# Altium PCB PCB1.PcbDoc
Units mil, origin at the board's own origin, x right, y up, seen from the top; angles counter-clockwise.
Board outline 6000 x 4000 mil, 2 copper layers (Top Layer, Bottom Layer); 14 components, 0 nets, 202 pads, 0 vias.
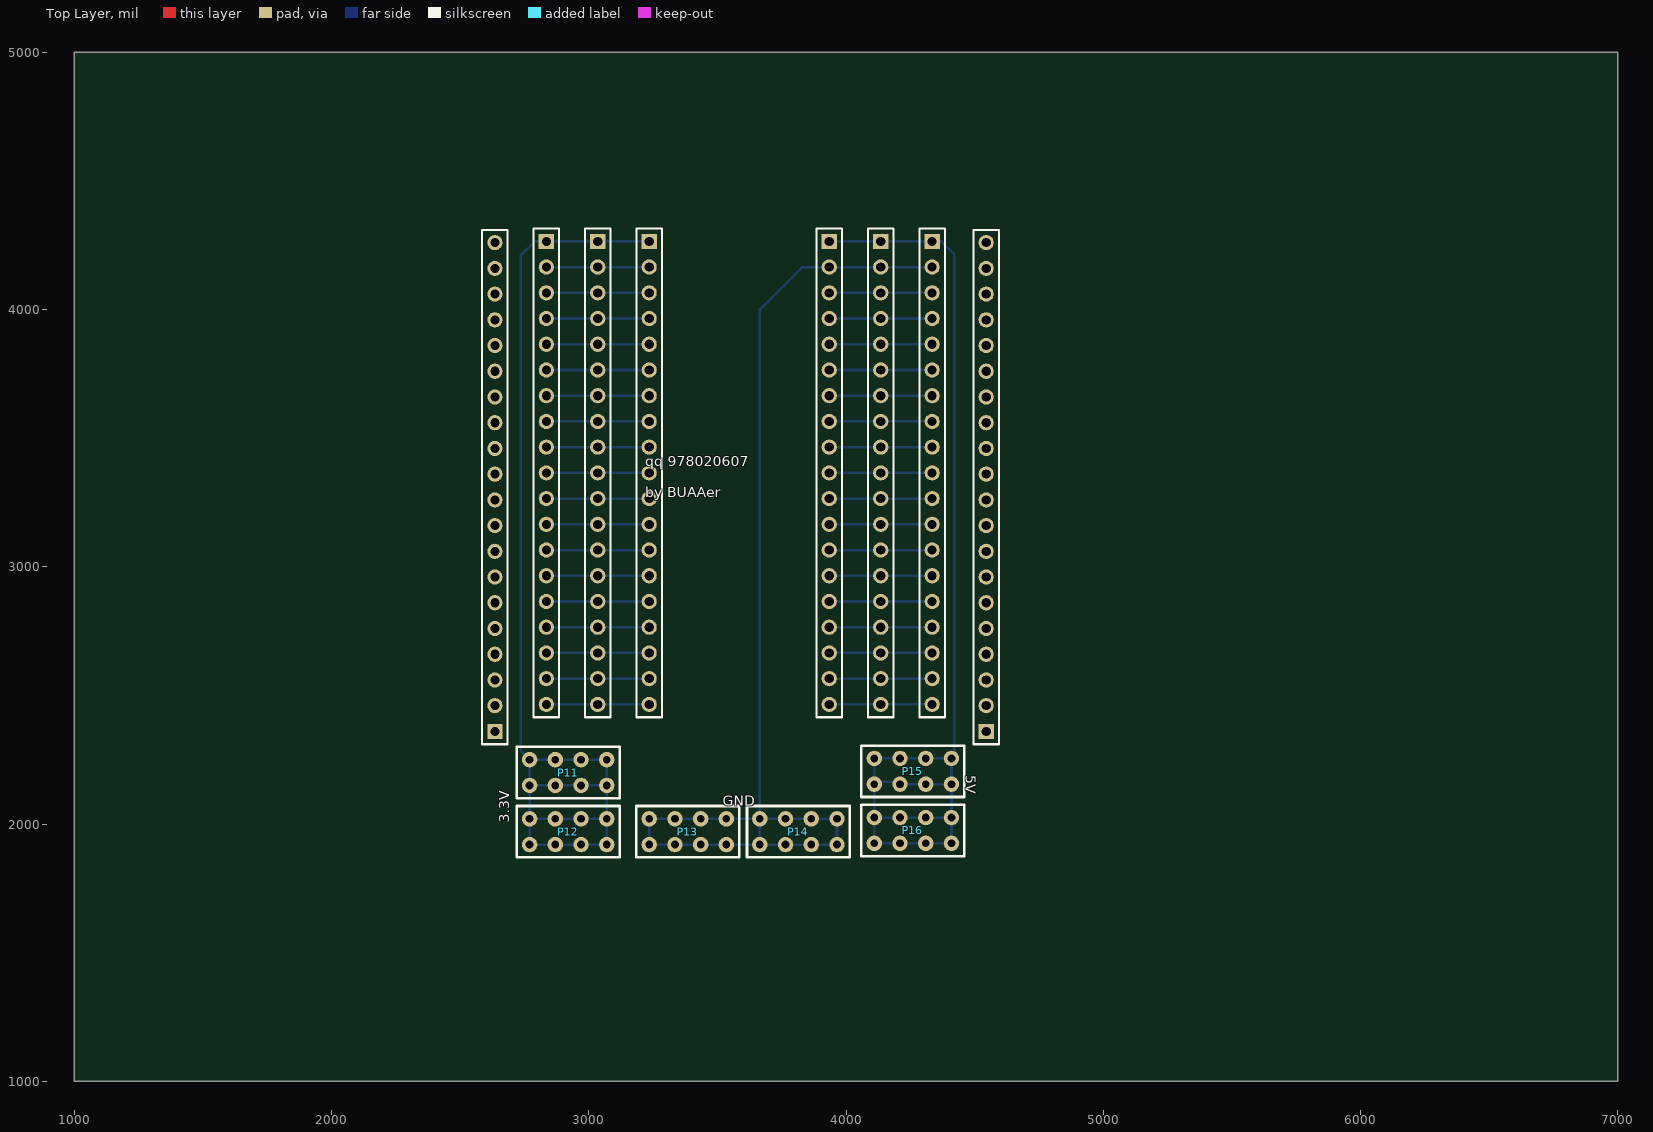
[diagram p0: Top Layer view]
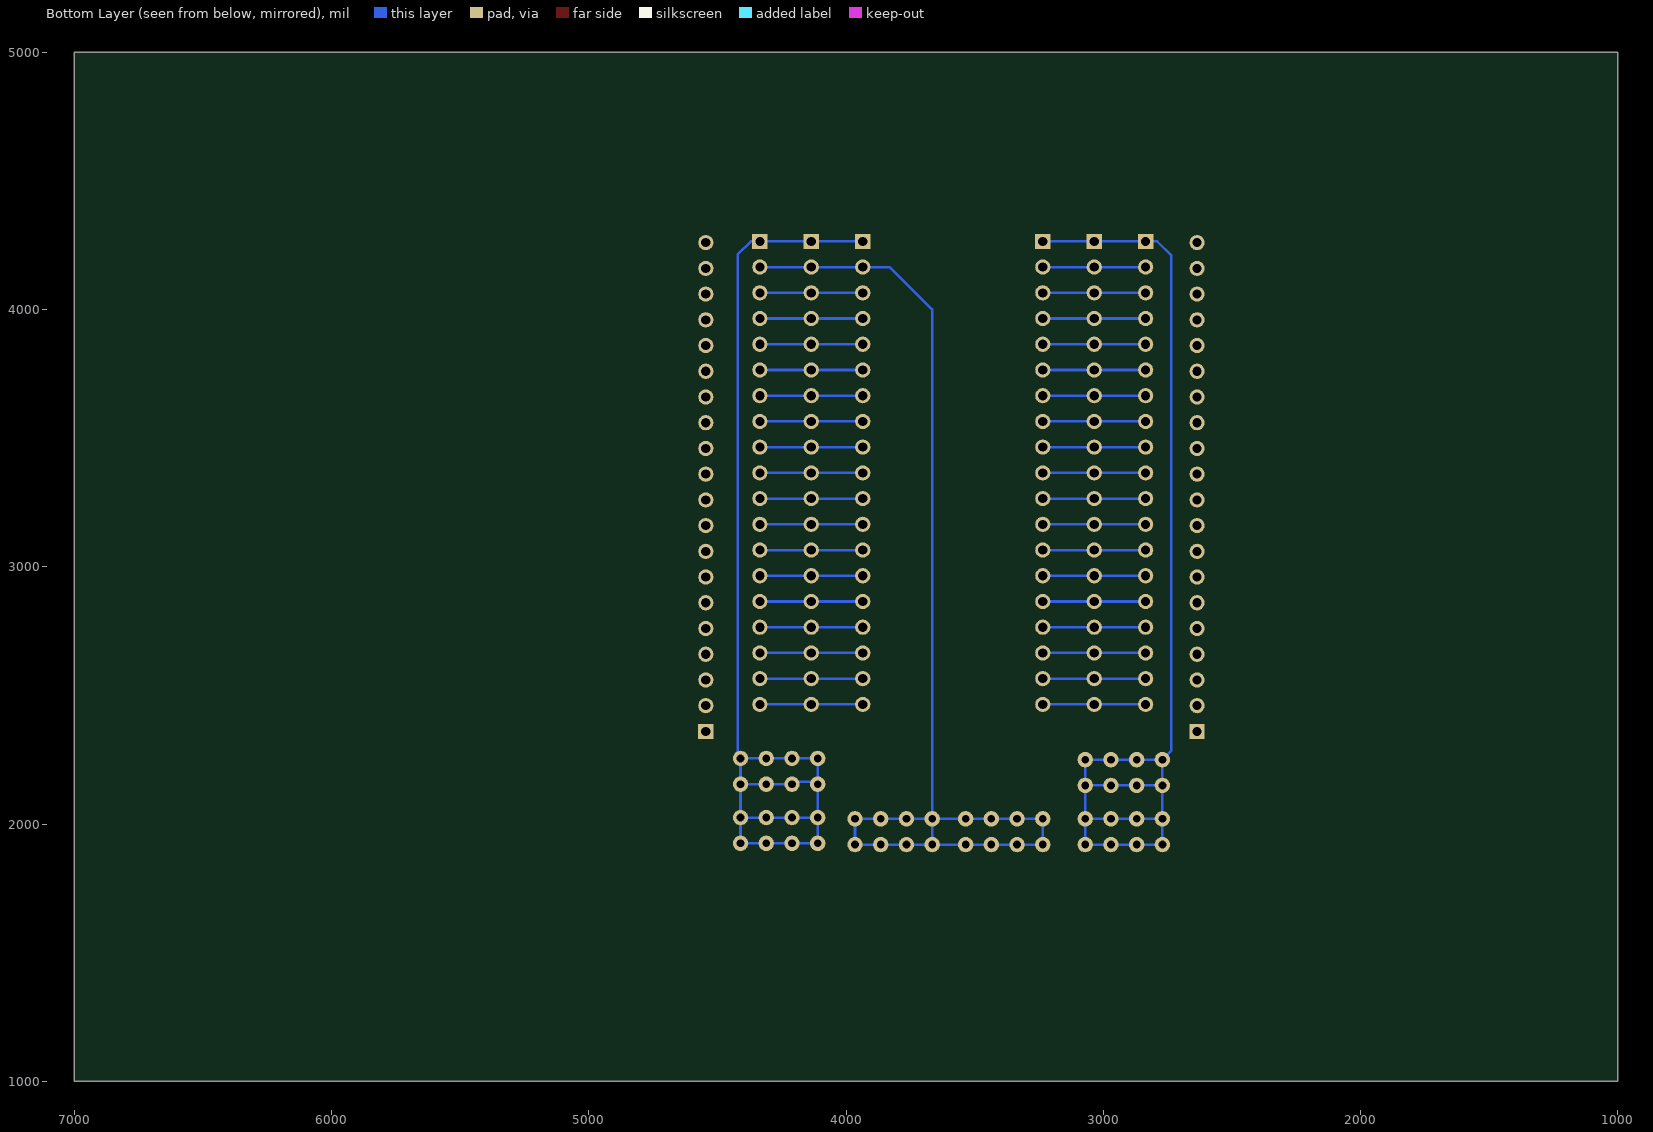
[diagram p1: Bottom Layer view, seen from below]

## Layer stack, top to bottom
Top Solder: solder mask 0.4, Solder Resist, Dk 3.5
Top Layer: signal copper 1.4
Dielectric 1: dielectric 12.6, FR-4, Dk 4.8
Bottom Layer: signal copper 1.4
Bottom Solder: solder mask 0.4, Solder Resist, Dk 3.5

## Board outline
1000,1000 7000,1000 7000,5000 1000,5000

## Design rules (kind name [scope] priority, off if disabled: settings)
Clearance [All] p1: gap=10 ignorepadtopadclearanceinfootprint=FALSE except(0: Arc-Hole Track-Hole SMDPad-Hole THPad-Hole Via-Hole Fill-Hole Poly-Hole Region-Hole Text-Hole)
PolygonConnect [All] p1: connectstyle=Relief reliefconductorwidth=10 reliefentries=4 polygonreliefangle="90 Angle" airgapwidth=10
RoomDefinition ywz0705_2 [InComponentClass('ywz0705_2')] p1: confinementstyle=ConfineIn formatcopy=TRUE lockcomponents=FALSE outline 2560,1845 4635,1845 4635,4350 2560,4350
RoutingVias [All] p1: holewidth=28 width=50 viastyle="Through Hole" minholewidth=28 minwidth=50 maxholewidth=28 maxwidth=50
SolderMaskExpansion [All] p1: expansion=4
Width [All] p1: maxlimit=10 minlimit=10 preferedwidth=10
30 further rules are at their usual default settings.

## Components (designator, comment, footprint, x,y, rotation, side; value= is the part's Value field where it differs from the comment)
P11 "paizhen_2_4" paizhen_2_4 3070,2150 r90 top (schematic designator P9)
P12 "paizhen_2_4" paizhen_2_4 3070,1920 r90 top (schematic designator P9)
P13 "paizhen_2_4" paizhen_2_4 3535,1920 r90 top (schematic designator P9)
P14 "paizhen_2_4" paizhen_2_4 3965,1920 r90 top (schematic designator P9)
P15 "paizhen_2_4" paizhen_2_4 4410,2155 r90 top (schematic designator P9)
P16 "paizhen_2_4" paizhen_2_4 4410,1925 r90 top (schematic designator P9)
? "Comment" HDR1X20 4545,2360 r90 top
? "Comment" HDR1X20 2635,2360 r90 top
? "Comment" HDR1X19 2835,4265 r270 top
? "Comment" HDR1X19 4335,4265 r270 top
? "Comment" HDR1X19 4135,4265 r270 top
? "Comment" HDR1X19 3035,4265 r270 top
? "Comment" HDR1X19 3935,4265 r270 top
? "Comment" HDR1X19 3235,4265 r270 top

## Footprints (in the part's own frame and the unit in brackets; to place one, negate y for a bottom-side part, rotate by r counter-clockwise, add the part's x,y. Pads: shape width x height; smd on the part's side, far side on the other; paste and mask are expansions set on the pad)
HDR1X19 [mm] "Connector; Header; 19 Position"
  rect 1.5x1.5 hole 0.9: 1(0,0)
  round 1.5 hole 0.9: 2(2.54,0) 3(5.08,0) 4(7.62,0) 5(10.16,0) 6(12.7,0) 7(15.24,0) 8(17.78,0) 9(20.32,0) 10(22.86,0) 11(25.4,0) 12(27.94,0) 13(30.48,0) 14(33.02,0) 15(35.56,0) 16(38.1,0) 17(40.64,0) 18(43.18,0) 19(45.72,0)
  silkscreen extent -1.27,-1.27 46.99,1.27
HDR1X20 [mm] "Connector; Header; 20 Position"
  rect 1.5x1.5 hole 0.9: 1(0,0)
  round 1.5 hole 0.9: 2(2.54,0) 3(5.08,0) 4(7.62,0) 5(10.16,0) 6(12.7,0) 7(15.24,0) 8(17.78,0) 9(20.32,0) 10(22.86,0) 11(25.4,0) 12(27.94,0) 13(30.48,0) 14(33.02,0) 15(35.56,0) 16(38.1,0) 17(40.64,0) 18(43.18,0) 19(45.72,0) 20(48.26,0)
  silkscreen extent -1.27,-1.27 49.53,1.27
paizhen_2_4 [mil]
  round 60 hole 30: 1(100,0) 2(100,100) 3(100,200) 4(100,300) 5(0,300) 6(0,200) 7(0,100) 8(0,0)
  silkscreen extent -50,-50 150,350

## Nets (pads, with @x,y where several pads share a name; then routed paths per layer and width w, separated by ;. In a path a pad name is that pad's centre, name@x,y a point inside that pad or via, vN(x,y) a via of type N, cw(c..) or ccw(c..) an arc to the next point about the centre after c; other vN are vias at no path point)
pads on no net: ?.1 ?.2 ?.3 ?.4 ?.5 ?.6 ?.7 ?.8 ?.9 ?.10 ?.11 ?.12 ?.13 ?.14 ?.15 ?.16 ?.17 ?.18 ?.19 ?.20 P11.1 P11.2 P11.3 P11.4 P11.5 P11.6 P11.7 P11.8 P12.1 P12.2 P12.3 P12.4 P12.5 P12.6 P12.7 P12.8 P13.1 P13.2 P13.3 P13.4 P13.5 P13.6 P13.7 P13.8 P14.1 P14.2 P14.3 P14.4 P14.5 P14.6 P14.7 P14.8 P15.1 P15.2 P15.3 P15.4 P15.5 P15.6 P15.7 P15.8 P16.1 P16.2 P16.3 P16.4 P16.5 P16.6 P16.7 P16.8
copper on no net: | length 27347.9
  Bottom Layer w10: 2835,2465 3035,2465 3235,2465 ; 2835,2565 3035,2565 3235,2565 ; 2835,2665 3035,2665 3235,2665 ; 2835,2765 3035,2765 3235,2765 ; 2835,2865 3035,2865 3235,2865 ; 2835,2965 3035,2965 3235,2965 ; 2835,3065 3035,3065 3235,3065 ; 2835,3165 3035,3165 3235,3165 ; 2835,3265 3035,3265 3235,3265 ; 2835,3365 3035,3365 3235,3365 ; 2835,3465 3035,3465 3235,3465 ; 2835,3565 3035,3565 3235,3565 ; 2835,3665 3035,3665 3235,3665 ; 2835,3765 3035,3765 3235,3765 ; 2835,3865 3035,3865 3235,3865 ; 2835,3965 3035,3965 3235,3965 ; 2835,4065 3035,4065 3235,4065 ; 2835,4165 3035,4165 3235,4165 ; 3235,4265 3035,4265 2835,4265 2790,4265 2735,4210 2735,2285 2770,2250 ; 3935,2465 4135,2465 4335,2465 ; 3935,2565 4135,2565 4335,2565 ; 3935,2665 4135,2665 4335,2665 ; 3935,2765 4135,2765 4335,2765 ; 3935,2865 4135,2865 4335,2865 ; 3935,2965 4135,2965 4335,2965 ; 3935,3065 4135,3065 4335,3065 ; 3935,3165 4135,3165 4335,3165 ; 3935,3265 4135,3265 4335,3265 ; 3935,3365 4135,3365 4335,3365 ; 3935,3465 4135,3465 4335,3465 ; 3935,3565 4135,3565 4335,3565 ; 3935,3665 4135,3665 4335,3665 ; 3935,3765 4135,3765 4335,3765 ; 3935,3865 4135,3865 4335,3865 ; 3935,3965 4135,3965 4335,3965 ; 3935,4065 4135,4065 4335,4065 ; 3935,4265 4135,4265 4335,4265 4370,4265 4420,4215 4420,2265 4410,2255 ; 4110,2155 4110,2025 ; 4335,4165 4135,4165 3935,4165 3830,4165 3665,4000 3665,2035 3660,2030 3660,2025 3665,2020 ; 2770,2020 2770,1920 2870,1920 2970,1920 3070,1920 3070,2020 ; 2770,2020 2870,2020 2970,2020 3070,2020 ; 2770,2020 2770,2150 ; 2770,2150 2770,2250 ; 2770,2150 2870,2150 2970,2150 3070,2150 ; 2770,2250 2870,2250 2970,2250 3070,2250 3070,2150 ; 3070,2020 3070,2150 ; 3665,1920 3665,2020 ; 3665,1920 3535,1920 3435,1920 3335,1920 3235,1920 3235,2020 3335,2020 3435,2020 3535,2020 3665,2020 ; 3665,1920 3765,1920 3865,1920 3860,1925 3855,1925 3860,1920 3965,1920 3965,2020 3865,2020 3765,2020 3665,2020 ; 4110,2025 4110,1925 4210,1925 4310,1925 4410,1925 4410,2025 ; 4110,2025 4100,2025 4210,2025 4310,2025 4410,2025 ; 4410,2025 4410,2255 ; 4410,2025 4410,2155 4310,2155 4210,2155 4205,2160 4205,2165 4105,2165 4110,2170 4110,2255 4210,2255 4310,2255 4410,2255

## Silkscreen, mask and mechanical layers (free items; w line width, h text height)
Top Overlay:
  text "qq 978020607 /  / by BUAAer" at 3220,3270 h40
  text "5V" at 4465,2190 h40 r270
  text "GND" at 3520,2070 h40
  text "3.3V" at 2690,2005 h40 r90
Mechanical 1:
  lines w10: 2550,1905 2550,4310 2590,4350 4585,4350 4635,4300 4635,1885 4595,1845 2610,1845 2550,1905